# EAGLE board rx5808 vTup 0.4 (EAGLE 7.4.0)
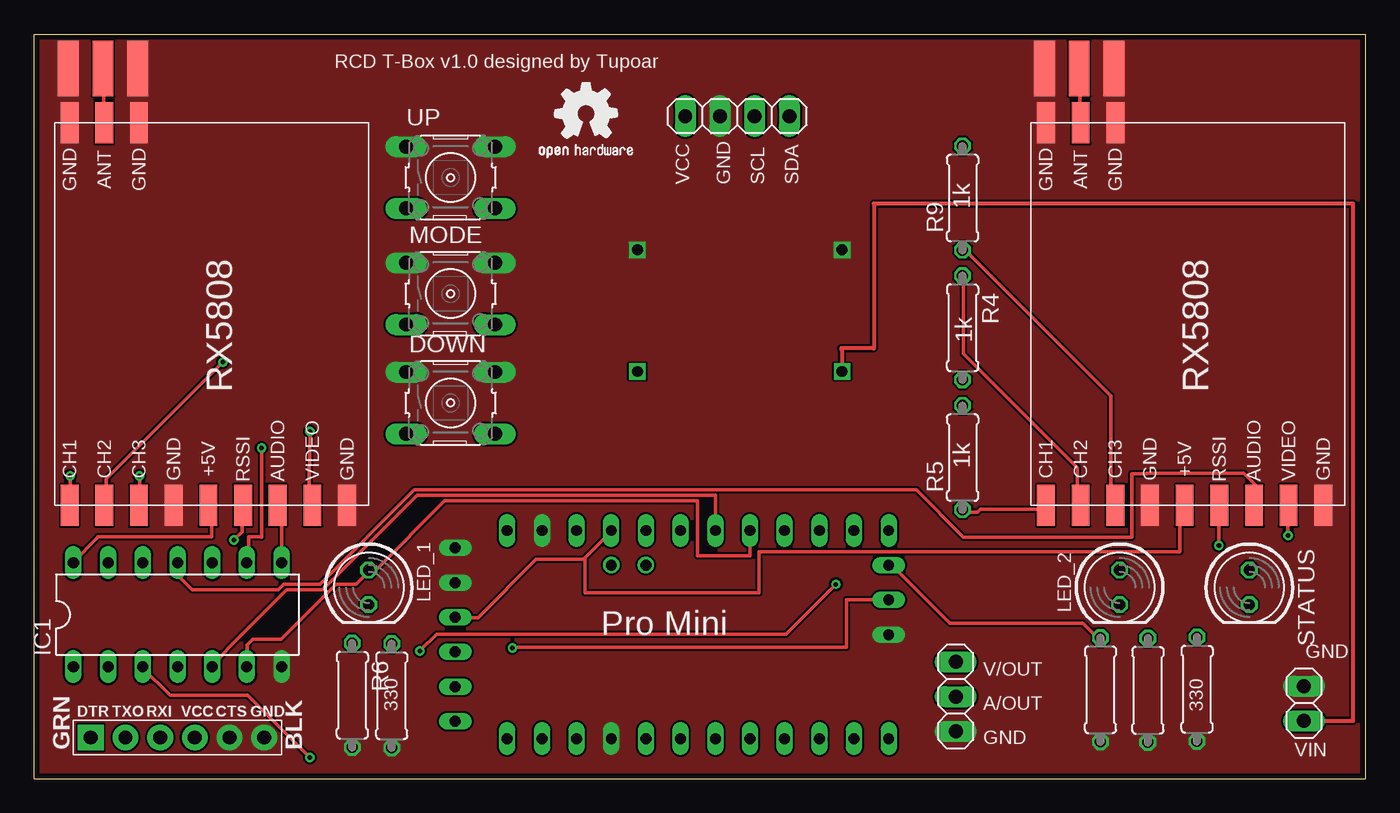
[diagram p0: board, top side]
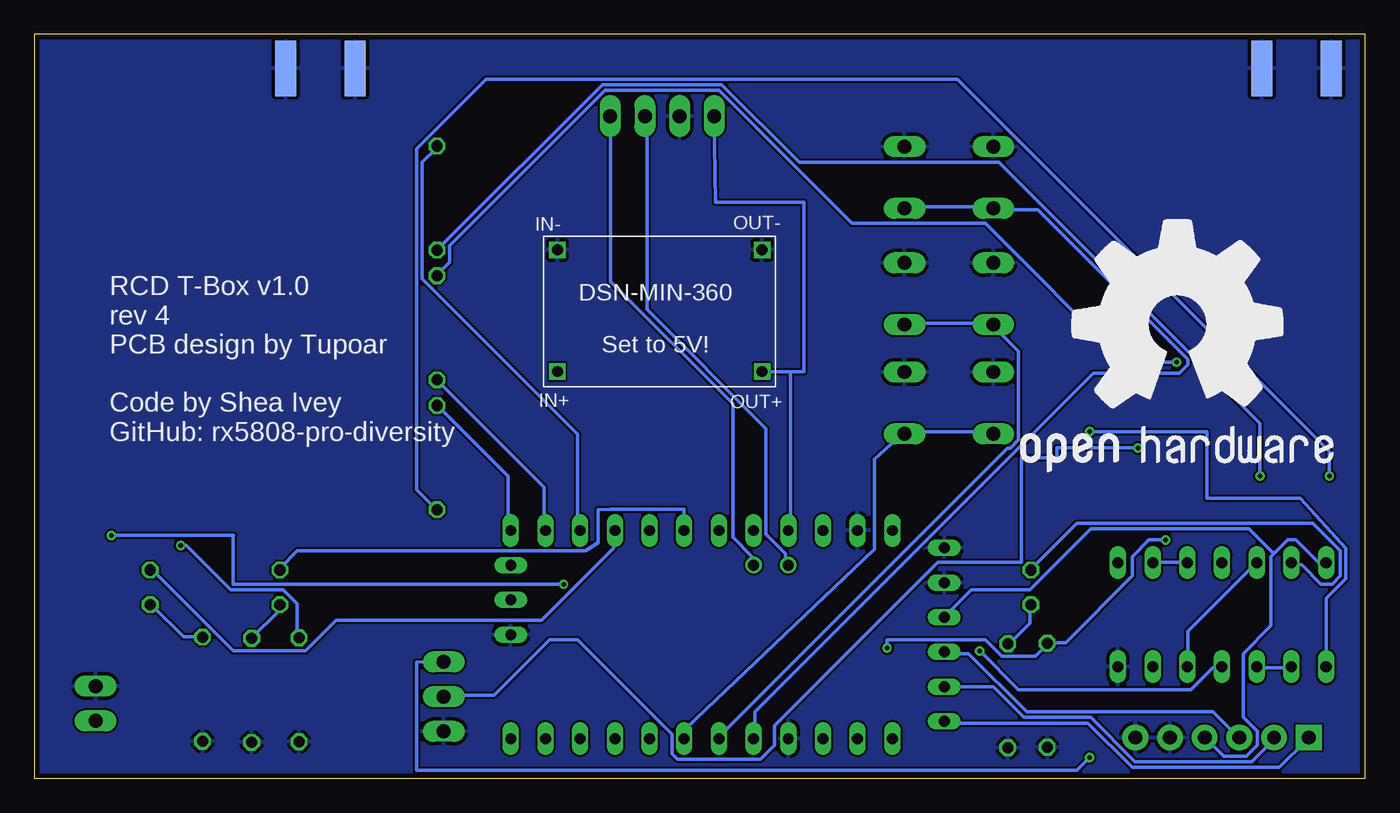
[diagram p1: board, bottom side, seen from below]

Size 97.5 x 54.5 mm. Coordinates in mm from the lower left corner, seen from the top.
Outline: 0,0 97.5,0 97.5,54.5 0,54.5 0,0
Copper layers (1*16): Top 0.0356mm / dielectric 1.5011mm / Bottom 0.0356mm
Design rules "LaenPCBOrder *": minimum track width 10mil, minimum drill 13mil, track to track 6mil, track to pad 6mil, pad to pad 6mil, via to via 30mil, smd to smd 6mil, copper to edge 15mil, drill to drill 6mil, minimum pad ring 7mil, minimum via ring 7mil, stop-mask expansion 3mil, vias tented up to drill 0mil, thermal gap 10mil

## Footprints (pad centres in the part's own frame; a part is rotated, then mirrored left to right if it is on the bottom)
SMA-EDGE = smd 1.524 x 4.064: GND@0 0,0; GND@1 5.08,0; SIG 2.54,0 | smd 1.524 x 4.064 bottom: GND@2 0,0; GND@3 5.08,0
B3F-10XX = drill 1.016 long: 1 -3.251,2.261; 2 3.251,2.261; 3 -3.251,-2.261; 4 3.251,-2.261
MODEL360 = drill 0.8 square: IN+ 1.02,-7.4; IN- 1.02,1.5; OUT+ 16.02,-7.4; OUT- 16.02,1.5
DIL14 = drill 0.813 long: 1 -7.62,-3.81; 2 -5.08,-3.81; 3 -2.54,-3.81; 4 0,-3.81; 5 2.54,-3.81; 6 5.08,-3.81; 7 7.62,-3.81; 8 7.62,3.81; 9 5.08,3.81; 10 2.54,3.81; 11 0,3.81; 12 -2.54,3.81; 13 -5.08,3.81; 14 -7.62,3.81
FTDI_DEVICE_SIDE = drill 1.016 pad 1.88 square: P$1 -6.35,0 | drill 1.016 pad 1.88: P$2 -3.81,0; P$3 -1.27,0; P$4 1.27,0; P$5 3.81,0; P$6 6.35,0
1X02 = drill 1.016 long: 1 -1.27,0; 2 1.27,0
1X03 = drill 1.016 long: 1 -2.54,0; 2 0,0; 3 2.54,0
LED5MM = drill 0.813 octagon: A -1.27,0; K 1.27,0
1X04 = drill 1.016 long: 1 -3.81,0; 2 -1.27,0; 3 1.27,0; 4 3.81,0
0207/7 = drill 0.813 octagon: 1 -3.81,0; 2 3.81,0
RX5808 = smd 3 x 1.3: +5V 28,11.26; ANT 0,3.64; AUDIO 28,16.34; CH1 28,1.1; CH2 28,3.64; CH3 28,6.18; GND1 28,21.42; GND2 28,8.72; GND3 0,1.1; GND4 0,6.18; RSSI 28,13.8; VIDEO 28,18.88
ABK-PRO-MINI = drill 0.8 long: A0 10.16,-11.43; A1 10.16,-8.89; A2 10.16,-6.35; A3 10.16,-3.81; A6 5.08,-21.59; A7 7.62,-21.59; D2 -5.08,-3.81; D3 -5.08,-6.35; D4 -5.08,-8.89; D5 -5.08,-11.43; D6 -5.08,-13.97; D7 -5.08,-16.51; D8 -5.08,-19.05; D9 -5.08,-21.59; D10 10.16,-21.59; D11 10.16,-19.05; D12 10.16,-16.51; D13 10.16,-13.97; DTR 8.89,10.16; GND 10.16,3.81; GND1 -5.08,-1.27; GND2 -3.81,10.16; GND3 -1.27,10.16; GND4 2.54,-21.59; RAW 10.16,6.35; RST 10.16,1.27; RST1 -5.08,1.27; RX1 -5.08,3.81; RX1-1 3.81,10.16; TX0 -5.08,6.35; TX0-1 6.35,10.16; VCC 10.16,-1.27; VCC1 1.27,10.16 | drill 0.8: A4 7.62,-3.81; A5 7.62,-1.27

## Placement (x,y rotation side)
ANT1  SMA_EDGE  [SMA-EDGE]  2.5,52 0 top
ANT2  SMA_EDGE  [SMA-EDGE]  74,52 0 top
DOWN  [B3F-10XX]  30.5,27.5 0 top
DSN-MINI-360  MODEL360  [MODEL360]  60.2,37.2 0 bottom
GOLD_ORB_SM1  OSHWLOGO_GOLD_ORB_LG  [OSHW0]  26.5,19 0 bottom
GOLD_ORB_SM2  OSHWLOGO_GOLD_ORB_SM  [OSHW2]  36.6,44.4 0 top
IC1  4066N  [DIL14]  10.5,12 0 top
JP1  FTDI_DEVICE  [FTDI_DEVICE_SIDE]  10.5,3 0 top
JP2  [1X02]  93,5.5 270 top
JP3  [1X03]  67.5,6 270 top
LED_1  [LED5MM]  24.5,14 270 top
LED_2  [LED5MM]  79.5,14 270 top
MODE  [B3F-10XX]  30.5,35.5 0 top
OLED  [1X04]  51.5,48.5 180 top
R1  330  [0207/7]  26.19,6.06 270 top
R2  330  [0207/7]  81.57,6.46 270 top
R3  330  [0207/7]  85.17,6.54 270 top
R4  1k  [0207/7]  68,33 270 top
R5  1k  [0207/7]  68,23.5 90 top
R6  100k  [0207/7]  23.3,6.1 270 top
R7  100k  [0207/7]  78.1,6.5 270 top
R9  1k  [0207/7]  68,42.5 90 top
RECEIVER_A  RX5808_A  [RX5808]  1.5,48 270 top
RECEIVER_B  RX5808_B  [RX5808]  73,48 270 top
STATUS  [LED5MM]  89,14 270 top
U$1  Pro Mini  [ABK-PRO-MINI]  41,8 90 top
UP  [B3F-10XX]  30.5,44 0 top

## Library data of the parts
ANT1 ANT2 JP1 = SparkFun-Connectors
DOWN MODE UP = switch-omron; MPN: B3F-1000; OC_FARNELL: 176432; OC_NEWARK: 36M3542
DSN-MINI-360 = Model-360-Step-Down
GOLD_ORB_SM1 GOLD_ORB_SM2 = open-source
IC1 = 40xx
JP2 JP3 OLED = pinhead
LED_1 LED_2 STATUS = led
R1-R7 R9 = rcl
RECEIVER_A RECEIVER_B = 1customstuff
U$1 = Arduino-clone

## Nets
A0: IC1.6 IC1.13 LED_1.A U$1.A0
A1: IC1.5 IC1.12 LED_2.A U$1.A1
ANT1: ANT1.SIG RECEIVER_A.ANT
ANT2: ANT2.SIG RECEIVER_B.ANT
AUD1: IC1.8 RECEIVER_A.AUDIO
AUD2: IC1.11 RECEIVER_B.AUDIO
AUDOUT: IC1.9 IC1.10 JP3.2
D2: U$1.D2 UP.3 UP.4
D3: MODE.3 MODE.4 U$1.D3
D4: DOWN.3 DOWN.4 U$1.D4
D10: R5.2 U$1.D10
D11: R4.2 U$1.D11
D12: R9.2 U$1.D12
D13: STATUS.A U$1.D13
DTR: JP1.P$1 U$1.GND2
GND: ANT1.GND@0 ANT1.GND@1 ANT1.GND@2 ANT1.GND@3 ANT2.GND@0 ANT2.GND@1 ANT2.GND@2 ANT2.GND@3 DOWN.1 DOWN.2 DSN-MINI-360.IN- DSN-MINI-360.OUT- IC1.7 JP1.P$5 JP1.P$6 JP2.1 JP3.3 MODE.1 MODE.2 OLED.3 R1.2 R2.2 R3.2 R6.2 R7.2 RECEIVER_A.GND1 RECEIVER_A.GND2 RECEIVER_A.GND3 RECEIVER_A.GND4 RECEIVER_B.GND1 RECEIVER_B.GND2 RECEIVER_B.GND3 RECEIVER_B.GND4 U$1.DTR U$1.GND U$1.GND1 U$1.GND4 U$1.TX0-1 UP.1 UP.2
N$1: LED_1.K R1.1
N$2: LED_2.K R2.1
N$3: R3.1 STATUS.K
N$5: DSN-MINI-360.IN+ JP2.2
RSSI_A: R6.1 RECEIVER_A.RSSI U$1.A6
RSSI_B: R7.1 RECEIVER_B.RSSI U$1.A7
RX: JP1.P$3 U$1.VCC1
SCL: OLED.2 U$1.A5
SDA: OLED.1 U$1.A4
SPI_CLK: R9.1 RECEIVER_A.CH3 RECEIVER_B.CH3
SPI_DATA: R5.1 RECEIVER_A.CH1 RECEIVER_B.CH1
SPI_SEL: R4.1 RECEIVER_A.CH2 RECEIVER_B.CH2
TX: JP1.P$2 U$1.GND3
VCC: DSN-MINI-360.OUT+ IC1.14 JP1.P$4 OLED.4 RECEIVER_A.+5V RECEIVER_B.+5V U$1.RX1-1 U$1.VCC
VID1: IC1.1 RECEIVER_A.VIDEO
VID2: IC1.4 RECEIVER_B.VIDEO
VIDOUT: IC1.2 IC1.3 JP3.1

## Tracks (layer width: path | path; a pad name or v marks a point on that pad's centre or on a via)
A0
  Top 0.254: 24.59,15.24 24.99,15.24 30.07,20.32 48.6,20.32 48.6,16.3 52.43,16.3 U$1.A0 | 24.59,15.24 23.57,14.22 22.12,14.22 18.1,10.2 16,10.2 15.6,9.8 15.6,8.21 IC1.6 | 24.59,15.24 LED_1.A
  Bottom 0.254: IC1.13 5.28,15.65 4.67,15.65 3.25,14.22 2.44,14.22 1.83,14.83 1.83,16.66 3.86,18.69 21.13,18.69 24.38,15.44 LED_1.A
A1
  Top 0.254: 49.89,20.73 28.04,20.73 21.13,13.82 18.49,13.82 14.22,9.55 IC1.5 | 49.9,20.73 49.89,20.73 | 49.89,20.73 U$1.A1
  Bottom 0.254: IC1.5 13.01,8.33 13.01,10.77 8.13,15.65 IC1.12 | LED_2.A 79.45,15.44 78.23,16.66 57.1,16.66 56.19,17.27 56.19,19.69 55.27,19.71 50.8,19.71 50,19.7 49.89,19.7 U$1.A1
ANT1
  Top 0.254: RECEIVER_A.ANT 5.08,48.16 5.08,51.82 ANT1.SIG
ANT2
  Top 0.254: RECEIVER_B.ANT 76.61,48.16 76.61,51.82 ANT2.SIG
AUD1
  Top 0.254: 18.09,16.87 18.09,15.85 IC1.8 18.12,19.91 17.68,19.91 RECEIVER_A.AUDIO
AUD2
  Top 0.254: IC1.11 10.57,15.65 10.57,14.83 11.58,13.82 17.88,13.82 18.29,14.22 20.93,14.22 27.84,21.13 64.62,21.13 68.07,17.68 80.4,17.68 80.4,22.3 81.48,22.3 81.48,22.35 88.59,22.35 89.41,21.54 89.41,20.12 RECEIVER_B.AUDIO
AUDOUT  (via drill 0.33)
  Top 0.254: IC1.9 15.65,15.85 15.7,15.85 15.7,17.7 16.66,17.7 | 16.66,17.7 v16.66,24.21 | 16.66,17.7 16.66,17.68
  Bottom 0.254: IC1.10 13.21,15.85 15.44,15.85 IC1.9 | 25.2,15.85 31.29,15.85 43.28,3.86 43.28,2.44 44.3,1.42 50.39,1.42 50.8,1.83 50.8,3.25 57.71,10.16 59.74,10.16 63.8,6.1 67.46,6.1 JP3.2 | 25.2,15.85 | 25.2,15.85 25.2,23.5 22.6,23.5 | 22.6,23.5 22.6,23.4 | 22.6,23.5 22.6,24.2 v16.66,24.2 v16.66,24.21
D2
  Bottom 0.254: U$1.D2 44.7,3.05 44.7,4.88 19.91,29.67 13.61,29.67 13.01,30.28 13.01,30.68 23.98,41.66 27.23,41.66 UP.3 27.43,41.86 33.73,41.86 UP.4
D3
  Bottom 0.254: U$1.D3 47.35,3.05 26.21,24.18 26.01,24.18 25.4,24.79 25.4,31.29 27.23,33.12 MODE.3 27.43,33.33 33.73,33.33 MODE.4
D4
  Bottom 0.254: U$1.D4 49.78,3.05 49.78,3.66 35.96,16.78 35.96,23.37 33.93,25.2 DOWN.4 33.73,25.4 27.43,25.4 DOWN.3
D10
  Bottom 0.254: U$1.D10 62.79,18.29 62.79,22.15 67.87,27.23 R5.2
D11
  Bottom 0.254: U$1.D11 60.15,18.29 60.15,21.34 67.87,29.06 R4.2
D12
  Bottom 0.254: U$1.D12 57.71,18.29 57.71,25.2 69.09,36.58 69.09,45.11 68.07,46.13 R9.2
D13
  Bottom 0.254: U$1.D13 55.07,18.09 55.07,16.87 60.35,11.58 75.39,11.58 77.62,9.35 82.91,9.35 88.8,15.24 STATUS.A
DTR
  Bottom 0.254: U$1.GND2 30.68,4.06 20.32,4.06 17.07,0.81 6.3,0.81 4.27,2.85 JP1.P$1
GND
  pour Bottom: 0,54.5 97.5,54.5 97.5,0 0,0
  pour Top (no thermals): 0,54.5 97.5,54.5 97.5,0 0,0
N$1
  Bottom 0.254: LED_1.K 24.59,12.6 24.59,11.38 26.01,9.96 R1.1
N$2
  Bottom 0.254: LED_2.K 79.65,12.6 79.65,12.19 81.48,10.36 R2.1
N$3
  Bottom 0.254: R3.1 85.34,10.36 86.56,10.36 88.8,12.6 STATUS.K
N$5
  Top 0.254: 59.1,31.5 59.1,31.4 59.18,31.4
  Top 0.305: JP2.2 96.6,4.23 96.6,42.1 61.5,42.1 61.5,31.5 59.1,31.5 | 59.18,31.4 DSN-MINI-360.IN+
RSSI_A  (via drill 0.33)
  Top 0.254: 62.59,13.01 U$1.A6 62.59,13.1 59.5,13.1 59.5,9.6 35.04,9.6 v35.04,9.55 | v14.63,17.48 15.24,18.09 15.24,19.91 RECEIVER_A.RSSI
  Bottom 0.254: v14.63,17.48 15.85,17.48 17.07,16.26 17.07,14.83 21.95,9.96 23.16,9.96 R6.1 23.37,9.75 24.18,8.94 26.62,8.94 27.84,10.16 35.04,10.16 v35.04,9.55
RSSI_B  (via drill 0.33)
  Top 0.254: U$1.A7 62.79,15.44 62.99,15.44 67.06,11.38 76.81,11.38 78.03,10.16 R7.1 | v86.77,17.07 86.77,19.91 RECEIVER_B.RSSI
  Bottom 0.254: v86.77,17.07 86.36,17.07 83.11,13.82 79.25,13.82 78.23,12.8 78.23,10.36 R7.1
RX
  Bottom 0.254: U$1.VCC1 30.68,9.14 29.06,9.14 24.79,4.88 11.18,4.88 9.35,3.05 JP1.P$3
SCL
  Bottom 0.254: U$1.A5 42.47,15.65 42.47,16.46 43.89,17.88 43.89,25.6 52.63,34.34 52.63,48.36 OLED.2
SDA
  Bottom 0.254: U$1.A4 44.91,15.65 44.91,16.26 46.33,17.68 46.33,27.43 55.27,36.37 55.27,48.36 OLED.1
SPI_CLK  (via drill 0.33)
  Top 0.254: R9.1 68.07,38.61 68.28,38.61 78.84,28.04 78.84,20.32 79.05,20.12 RECEIVER_B.CH3 | v7.72,22.15 7.72,20.12 RECEIVER_A.CH3
  Bottom 0.254: v7.72,22.15 7.72,26.01 26.82,45.11 41.45,45.11 47.14,50.8 55.88,50.8 67.87,38.81 R9.1
SPI_DATA  (via drill 0.33)
  Top 0.254: R5.1 68.07,19.51 69.09,19.51 69.29,19.71 73.76,19.71 73.97,19.91 RECEIVER_B.CH1 | v2.64,22.15 2.64,20.12 RECEIVER_A.CH1
  Bottom 0.254: v2.64,22.15 2.64,23.98 29.87,51.21 64.41,51.21 69.49,46.13 69.49,21.13 68.07,19.71 R5.1
SPI_SEL  (via drill 0.33)
  Top 0.254: R4.1 68.07,36.78 68.07,31.09 76.4,22.76 76.4,20.32 76.61,20.12 RECEIVER_B.CH2 | v13.82,30.48 5.28,21.95 5.28,20.12 RECEIVER_A.CH2
  Bottom 0.254: v13.82,30.48 17.68,30.48 27.84,40.64 37.59,40.64 47.35,50.39 55.68,50.39 67.06,39.01 67.06,37.8 67.87,36.98 R4.1
TX
  Bottom 0.254: U$1.GND3 30.68,6.71 27.23,6.71 24.99,4.47 20.12,4.47 16.87,1.22 8.33,1.22 6.71,2.85 JP1.P$2
VCC
  Top 0.254: RECEIVER_B.+5V 84.12,19.91 83.92,19.71 83.9,19.71 83.9,16.6 53.1,16.6 53.1,13.6 40.34,13.6 40.34,16.16 | RECEIVER_A.+5V 12.6,19.91 13,19.91 13,17.7 4.67,17.7 4.67,17.68 2.85,15.85 IC1.14 | 40.34,16.16 42.27,18.09 U$1.VCC | 40.34,16.16 40.23,16.05 36.78,16.05 32.51,11.79 30.89,11.79 U$1.RX1-1
  Bottom 0.254: 6.71,16.46 6.91,16.26 6.91,11.18 8.94,9.14 8.94,4.47 7.92,3.45 7.92,2.44 8.74,1.63 10.36,1.63 11.58,2.85 JP1.P$4 | 6.71,16.46 5.69,17.48 5.08,17.48 3.45,15.85 3.05,15.85 IC1.14 | 6.71,16.46 8.53,18.29 20.12,18.29 24.59,13.82 28.85,13.82 30.68,11.99 U$1.RX1-1 | OLED.4 47.6,42.2 41.1,42.2 41.1,29.8 42.1,29.8 | 42.1,29.8 DSN-MINI-360.OUT+ | U$1.VCC 42.1,18.16 42.1,29.8
VID1  (via drill 0.33)
  Top 0.254: v20.2,25.42 20.12,20.32 20.32,20.12 RECEIVER_A.VIDEO
  Bottom 0.254: IC1.1 2.85,8.33 2.85,13.21 1.42,14.63 1.42,16.87 4.78,20.52 11.6,20.52 11.6,25.4 20.2,25.4 v20.2,25.42
VID2  (via drill 0.33)
  Top 0.254: v28.25,9.35 29.46,10.57 55.07,10.57 v58.73,14.22 | v91.83,17.79 91.85,19.91 RECEIVER_B.VIDEO
  Bottom 0.254: v28.25,9.35 25.4,6.5 12.8,6.5 11.18,8.13 10.57,8.13 IC1.4 | v58.73,14.22 82.91,14.22 82.91,17.8 82.9,17.8 82.9,17.79 v91.83,17.79
VIDOUT  (via drill 0.33)
  Top 0.254: v20.21,1.53 15.65,6.1 9.96,6.1 7.92,8.13 IC1.3
  Bottom 0.254: IC1.2 5.49,8.13 7.92,8.13 IC1.3 | 67.67,8.13 67.67,8.53 JP3.1 69.5,8.5 69.5,0.6 62.18,0.6 62.18,0.61 21.13,0.61 v20.21,1.53

## Text on the board
tPlace: RCD T-Box v1.0 designed by Tupoar | VCC | GND | SCL | SDA | Pro Mini | GND | V/OUT | A/OUT | GND | VIN
bPlace: OUT- | IN- | DSN-MIN-360 / / Set to 5V! | OUT+ | IN+
bNames: RCD T-Box v1.0 / rev 4 / PCB design by Tupoar / / Code by Shea Ivey / GitHub: rx5808-pro-diversity